# EAGLE board Circuito mixto de luces LED (EAGLE 9.7.0)

Size 115.34 x 25.94 mm. Coordinates in mm from the lower left corner, seen from the top.
Outline: 0,0 115.34,0 115.34,25.94 0,25.94 0,0
Copper layers (1*16): Top 0.035mm / dielectric 1.5mm / Bottom 0.035mm
Design rules "default": minimum track width 6mil, minimum drill 0.35mm, track to track 6mil, track to pad 6mil, pad to pad 6mil, via to via 6mil, smd to smd 6mil, copper to edge 40mil, drill to drill 6mil, minimum pad ring 10mil, minimum via ring 8mil, stop-mask expansion 4mil, vias tented up to drill 0mil, thermal gap 10mil

## Footprints (pad centres in the part's own frame; a part is rotated, then mirrored left to right if it is on the bottom)
BATTERY-GENERIC = drill 1.118 pad 3.15 octagon: + 2.54,0; - -2.54,0
LEDRD254W60D565H860B = drill 0.981 pad 1.581: 1 -1.27,0; 2 1.27,0
RESAD1016W63L850D250B = drill 0.83 pad 1.43: 1 -5.08,0; 2 5.08,0

## Placement (x,y rotation side)
BAT1  9V  [BATTERY-GENERIC]  8.26,8.26 90 top
D1  RED  [LEDRD254W60D565H860B]  68.64,18.03 180 top
D2  RED  [LEDRD254W60D565H860B]  88.96,18.03 180 top
D3  RED  [LEDRD254W60D565H860B]  101.66,18.03 180 top
D4  RED  [LEDRD254W60D565H860B]  109.28,18.03 180 top
D5  RED  [LEDRD254W60D565H860B]  109.28,10.41 180 top
R1  100  [RESAD1016W63L850D250B]  62.29,15.49 0 top

## Library data of the parts
BAT1 R1 = Tinkercad
D1-D5 = Tinkercad; CATEGORY: Opto-Electronic; SUB-CATEGORY: LED; VALUE: LED_RED

## Nets
BAT1+: BAT1.+ D4.1 D5.1
BAT1-: BAT1.- R1.1
D1_A: D1.1 D2.2
D1_C: D1.2 R1.2
D3_C: D2.1 D3.2
D4_C: D3.1 D4.2 D5.2

## Tracks (layer width: path | path; a pad name or v marks a point on that pad's centre or on a via)
BAT1+  (2 unrouted)
BAT1-  (1 unrouted)
D1_A  (1 unrouted)
D1_C  (1 unrouted)
D3_C  (1 unrouted)
D4_C  (2 unrouted)